# Altium PCB PCB_PCB_dayi_hossein_SSG_2_2025-04-10.pcbdoc
Units mil, origin at the board's own origin, x right, y up, seen from the top; angles counter-clockwise.
Board outline 3346.45 x 1968.5 mil, 2 copper layers (Top Layer, Bottom Layer); 16 components, 28 nets, 56 pads, 0 vias.
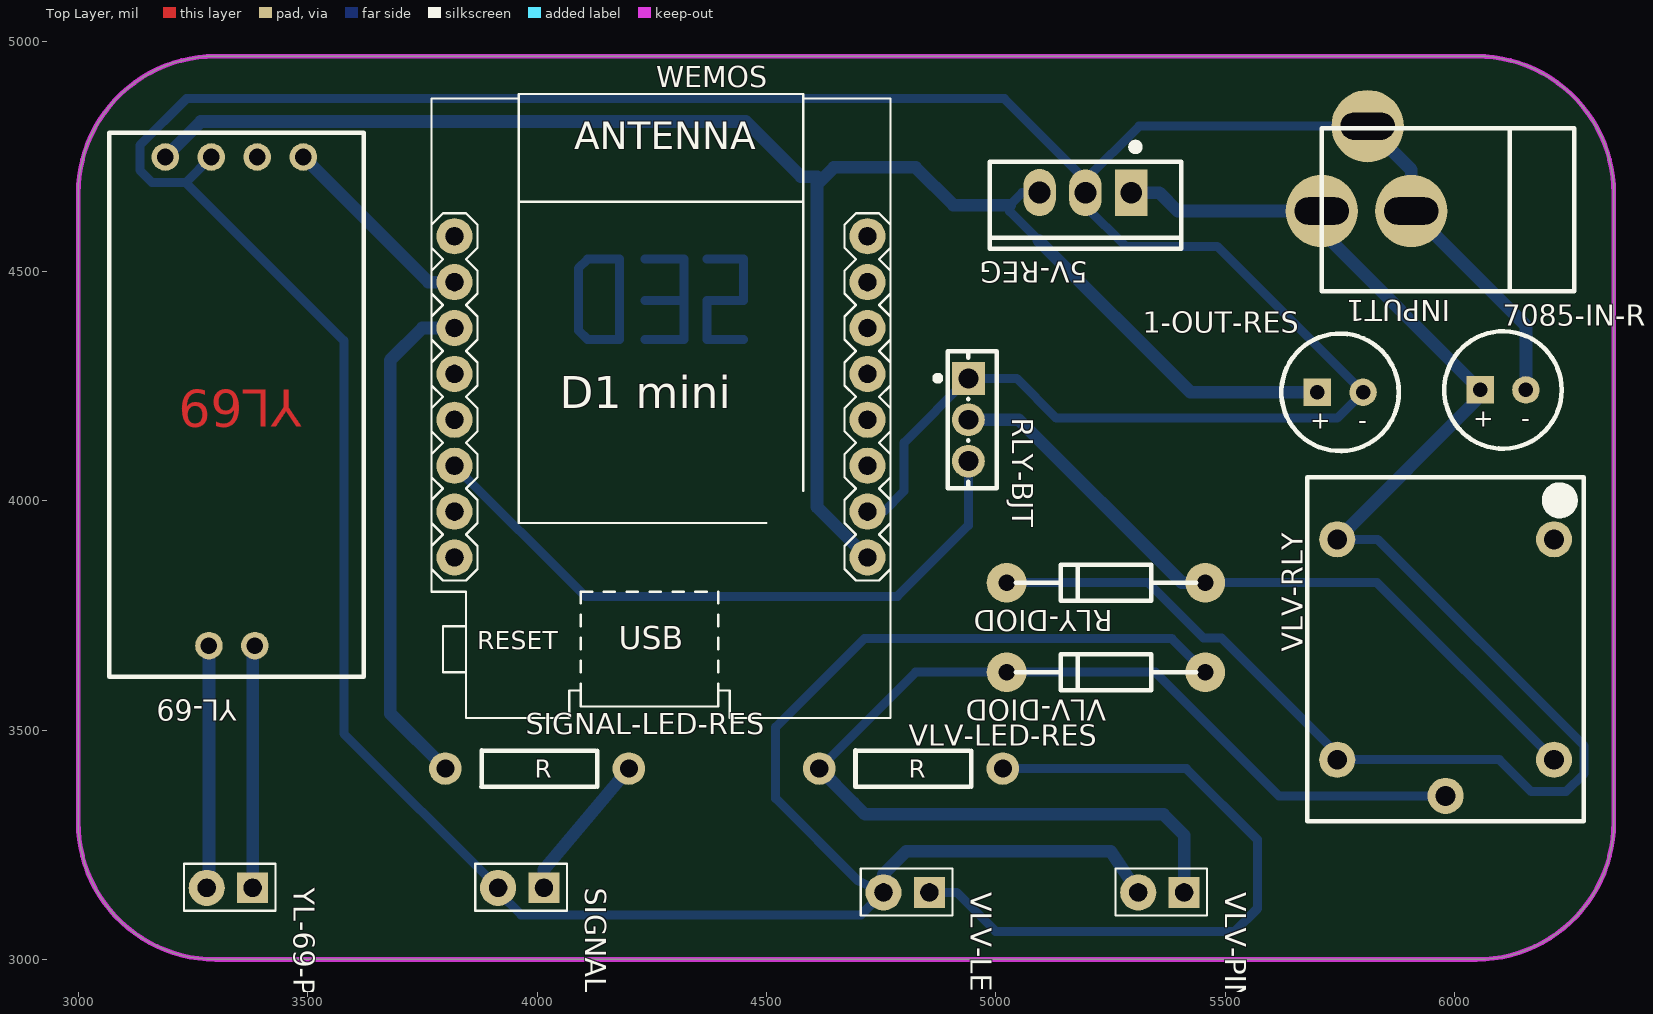
[diagram p0: Top Layer view]
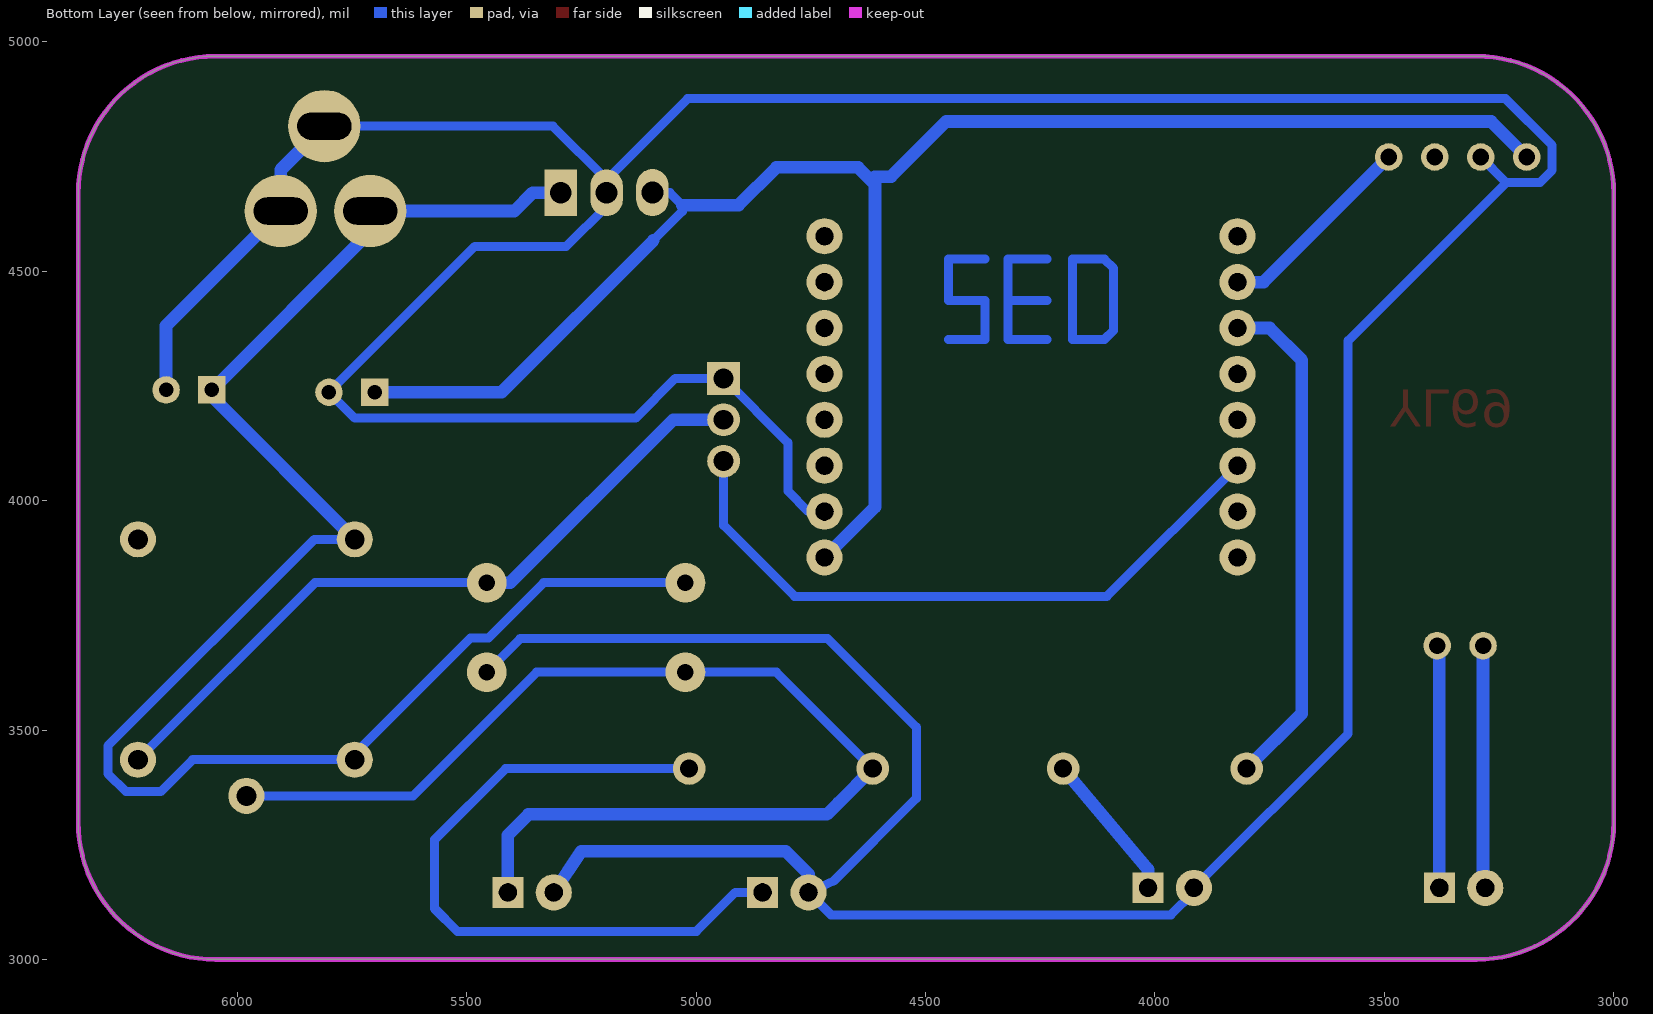
[diagram p1: Bottom Layer view, seen from below]

## Layer stack, top to bottom
Top Solder Mask Layer: solder mask 0.4, Solder Resist, Dk 3.5
Top Layer: signal copper 1.4
Dielectric1: dielectric 12.6, FR-4, Dk 4.8
Bottom Layer: signal copper 1.4
Bottom Solder Mask Layer: solder mask 0.4, Solder Resist, Dk 3.5

## Board outline
6346.45,3299.21 cw(c6047.24,3299.21) 6047.24,3000 3299.21,3000 cw(c3299.21,3299.21) 3000,3299.21 3000,4669.29 cw(c3299.21,4669.29) 3299.21,4968.5 6047.24,4968.5 cw(c6047.24,4669.29) 6346.45,4669.29

## Design rules (kind name [scope] priority, off if disabled: settings)
Clearance Default [All] p1: gap=15.7 ignorepadtopadclearanceinfootprint=FALSE except(0: Region-Region; 7: Arc-Arc Arc-Track Arc-SMDPad Arc-THPad Arc-Via Arc-Fill Arc-Poly Arc-Region Arc-Text Arc-Hole)
PasteMaskExpansion Common_1 [All] p1: expansion=0
PlaneConnect Default_3 [All] p1: planeconnectstyle=Relief reliefexpansion=20 reliefentries=4 reliefconductorwidth=0 reliefairgap=1
PolygonConnect Default_4 [All] p1: connectstyle=Relief reliefconductorwidth=10 reliefentries=4 polygonreliefangle="90 Angle" airgapwidth=10
RoutingVias Default_2 [All] p1: holewidth=15.75 width=27.56 viastyle="Through Hole" minholewidth=15.75 minwidth=27.56 maxholewidth=2362 maxwidth=3938
SolderMaskExpansion Common [All] p1: expansion=2 istentingtop=FALSE useseparateexpansions=TRUE expansionbottom=2 istentingbottom=FALSE
Width Default_1 [All] p1: maxlimit=1000 minlimit=20 preferedwidth=20
28 further rules are at their usual default settings.

## Components (designator, comment, footprint, x,y, rotation, side; value= is the part's Value field where it differs from the comment)
1-OUT-RES "10uF" "CAPACITOR, 100UF 2.54MM PIN CAPACITOR" 5750,4236.14 r0 top
5V-REG "LM7805T" TO-220-3_L10.0-W4.5-P2.54-L 5195,4671.14 r180 top
7085-IN-RES "33uF" "CAPACITOR, 100UF 2.54MM PIN CAPACITOR" 6105,4241.14 r0 top
INPUT1 "12V JACK" "12V JACK" 6260,4456.14 r180 top
RLY-BJT "BD137" TO-126-3_L7.6-W2.7-P2.30-L 4940,4176.14 r270 top
RLY-DIOD "1N4007" DIODE_1N4007 5220,3821.14 r180 top
SIGNAL-LED "2.45MM_1*2_PIN" CONNECTOR_PINHEADER_2.54MM:PINHEADER_1X11_P_2.54MM 4015,3156.14 r270 top
SIGNAL-LED-RES "180-220 ohm" "RESISTOR (UPDATED HOLES)" 4000,3416.14 r0 top
VLV-DIOD "1N4007" DIODE_1N4007 5220,3626.14 r180 top
VLV-LED "2.45MM_1*2_PIN" CONNECTOR_PINHEADER_2.54MM:PINHEADER_1X11_P_2.54MM 4855,3146.14 r270 top
VLV-LED-RES "490-510 ohm" "RESISTOR (UPDATED HOLES)" 4815,3416.14 r0 top
VLV-PINS "2.45MM_1*2_PIN" CONNECTOR_PINHEADER_2.54MM:PINHEADER_1X11_P_2.54MM 5410,3146.14 r270 top
VLV-RLY "Relay - 12V" RELAY-TH_BC_JQC-3FB-S-XXX-1Z11 5980,3636.14 r90 top
WEMOS "WEMOS_D1_MINI_PRO4" DIP-16_WEMOS_D1_MINI_PRO4 4270,4226.14 r0 top
YL-69 "YL-69" footprint_017c 3345,4161.14 r180 top
YL-69-PINS "2.45MM_1*2_PIN" CONNECTOR_PINHEADER_2.54MM:PINHEADER_1X11_P_2.54MM 3380,3156.14 r270 top

## Footprints (in the part's own frame and the unit in brackets; to place one, negate y for a bottom-side part, rotate by r counter-clockwise, add the part's x,y. Pads: shape width x height; smd on the part's side, far side on the other; paste and mask are expansions set on the pad)
"12V JACK" [mm]
  round 4 hole 1.5 slot 3 at 0 deg paste+0 mask+0.102: GND(9.017,-4.445) GND(11.43,-9.144) Vcc(13.97,-4.445)
  silkscreen extent 0,-9.02 13.97,0
"CAPACITOR, 100UF 2.54MM PIN CAPACITOR" [mm]
  rect 1.52x1.52 hole 0.8 paste+0 mask+0.051: 1(-1.27,0)
  round 1.52 hole 0.8 paste+0 mask+0.051: 2(1.27,0)
  silkscreen extent -3.25,-3.25 3.25,3.25
CONNECTOR_PINHEADER_2.54MM:PINHEADER_1X11_P_2.54MM [mm]
  rect 1.7x1.7 hole 1 slot 1.005 at 0 deg: 1(0,0)
  round 2 hole 1 slot 1.005 at 0 deg: 2(0,-2.54)
  silkscreen extent -1.33,-3.8 1.27,1.27
DIODE_1N4007 [mm]
  round 2.2 hole 0.914: 1(-6,0) 2(5,0)
  silkscreen extent -5.5,-1 4.5,1
DIP-16_WEMOS_D1_MINI_PRO4 [mm]
  round 2 hole 1 paste+0 mask+0.05: 1(11.43,8.89) 2(11.43,6.35) 3(11.43,3.81) 4(11.43,1.27) 5(11.43,-1.27) 6(11.43,-3.81) 7(11.43,-6.35) 8(11.43,-8.89) 9(-11.43,8.89) 10(-11.43,6.35) 11(-11.43,3.81) 12(-11.43,1.27) 13(-11.43,-1.27) 14(-11.43,-3.81) 15(-11.43,-6.35) 16(-11.43,-8.89)
  silkscreen extent -12.7,-17.78 12.7,16.76
footprint_017c [mil]
  round 60 hole 36: 1(-145.53,-587.7) 2(-45.02,-587.7) 3(55.02,-587.7) 4(155.11,-587.7) 5(-40.02,477.3) 6(60.02,477.3)
  silkscreen extent -278,-640 278,545
RELAY-TH_BC_JQC-3FB-S-XXX-1Z11 [mm]
  round 2 hole 1.1 paste+0 mask+0.05: 11(-7.1,0) 12(7.1,-6) 14(7.1,6) A1(-5.1,-6) A2(-5.1,6)
  silkscreen extent -8.5,-7.65 10.54,7.65
"RESISTOR (UPDATED HOLES)" [mm]
  round 1.8 hole 1 paste+0 mask+0.102: 1(-5.08,0) 2(5.08,0)
  silkscreen extent -3.08,-1.02 3.33,1.01
TO-126-3_L7.6-W2.7-P2.30-L [mil]
  rect 71.5x71.5 hole 43.31: 1(-90.16,0)
  round 71.5 hole 43.31: 2(0,0) 3(90.16,0)
  silkscreen extent -150,-73 150,62
TO-220-3_L10.0-W4.5-P2.54-L [mm]
  rect 1.8x2.6 hole 1.2: 1(-2.54,0.005)
  oval 1.8x2.6 hole 1.2: 2(0,0.005)
  oval 1.8x2.6 hole 1.2 copper offset 0,0: 3(2.541,-0.005)
  silkscreen extent -5.3,-2.73 5.3,3.09

## Nets (pads, with @x,y where several pads share a name; then routed paths per layer and width w, separated by ;. In a path a pad name is that pad's centre, name@x,y a point inside that pad or via, vN(x,y) a via of type N, cw(c..) or ccw(c..) an arc to the next point about the centre after c; other vN are vias at no path point)
+5V: 1-OUT-RES.1 5V-REG.3 WEMOS.8 YL-69.4 | length 4514.2
  Bottom Layer w19.68: 5V-REG.3 5057.2,4671.34 5029.82,4643.96 5029.82,4630.27 5423.95,4236.14 1-OUT-RES.1
  Bottom Layer w27.56: YL-69.4 3267.2,4826.14 4455,4826.14 4575,4706.14 4610,4706.14 4610,3986.14 WEMOS.8 ; 4610,4689.42 4646.72,4726.14 4825,4726.14 4907.18,4643.96 5029.82,4643.96 ; 5092.96,4567.13 5423.95,4236.14 1-OUT-RES.1
GND: 1-OUT-RES.2 5V-REG.2 7085-IN-RES.2 INPUT1.GND RLY-BJT.1 SIGNAL-LED.2 VLV-DIOD.1 VLV-LED.2 VLV-PINS.2 WEMOS.7 YL-69.3 | length 11615.1
  Bottom Layer w19.68: 3234.3,4693.24 3161.2,4693.24 3134.2,4720.24 3134.2,4774.34 3236,4876.14 5018.2,4876.14 5V-REG.2@5195,4699.34 ; YL-69.3 3234.33,4693.19 3579.08,4348.44 3579.08,3492.06 SIGNAL-LED.2 3915,3147.02 3965,3097.02 4705.88,3097.02 VLV-LED.2 ; WEMOS.7 4755,3976.14 4799.9,4021.04 4799.9,4126.14 RLY-BJT.1 ; VLV-LED.2@4770.82,3171.08 4755,3155.26 VLV-LED.2 ; RLY-BJT.1@4940,4243.06 RLY-BJT.1 5044.84,4266.3 5131.4,4179.74 5743.6,4179.74 1-OUT-RES.2 5482.19,4553.95 5283.04,4553.95 5195,4641.99 5195,4670.95 5195,4699.29 5311.85,4816.14 5810,4816.14 5905,4721.14 5905,4631.14 6155,4381.14 7085-IN-RES.2 ; VLV-DIOD.1 5383.1,3699.24 4713.1,3699.24 4520,3506.14 4520,3351.14 4700.1,3171.04 VLV-LED.2
  Bottom Layer w27.56: VLV-LED.2 4755,3186.14 4805,3236.14 5250,3236.14 VLV-PINS.2 ; INPUT1.GND@5810,4816.14 5905,4721.14 5905,4631.14 6155,4381.14 7085-IN-RES.2
S$171047:  | length 430
  Bottom Layer w19.68: 4235,4351.14 4320,4351.14 4320,4436.14 ; 4235,4436.14 4320,4436.14 ; 4235,4526.14 4320,4526.14 4320,4436.14
S$171098:  | length 506.6
  Bottom Layer w19.68: 4090,4371.14 4090,4506.14 4110,4526.14 4180,4526.14 4180,4351.14 4110,4351.14 4090,4371.14
S$171102:  | length 415
  Bottom Layer w19.68: 4370,4526.14 4450,4526.14 4450,4436.14 4370,4436.14 4370,4351.14 4450,4351.14
SIGNAL-LED-RES_2: SIGNAL-LED-RES.2 SIGNAL-LED.1 | length 327.4
  Bottom Layer w27.56: SIGNAL-LED.1 4015,3196.14 SIGNAL-LED-RES.2
VCC: 5V-REG.1 7085-IN-RES.1 INPUT1.Vcc RLY-DIOD.2 VLV-RLY.14 VLV-RLY.A2 | length 3674.8
  Bottom Layer w19.68: RLY-DIOD.2 5331.91,3821.14 5452.56,3700.49 5491.9,3700.49 5743.78,3448.61 VLV-RLY.A2 6096.84,3435.35 6166.57,3365.62 6242.23,3365.62 6281.6,3404.99 6281.6,3465.58 5831.51,3915.67 VLV-RLY.14
  Bottom Layer w27.56: 5V-REG.1 5356.05,4670.94 5395.85,4631.14 INPUT1.Vcc 5710,4586.14 7085-IN-RES.1 6055,4226.89 VLV-RLY.14
VLV-LED-RES_2: VLV-LED-RES.2 VLV-LED.1 | length 1540.1
  Bottom Layer w19.68: VLV-LED.1 4914.07,3146.14 ; 4914.1,3146.14 4999.1,3061.14 5520,3061.14 5570,3111.14 5570,3261.14 5415,3416.14 VLV-LED-RES.2
VLV-RLY_11: VLV-DIOD.2 VLV-LED-RES.1 VLV-PINS.1 VLV-RLY.11 | length 2543.7
  Bottom Layer w19.68: VLV-LED-RES.1 4825,3626.14 VLV-DIOD.2 5347.22,3626.14 5616.75,3356.61 VLV-RLY.11
  Bottom Layer w27.56: VLV-LED-RES.1 4690,3341.14 4715,3316.14 5365,3316.14 5410,3271.14 VLV-PINS.1
VLV-RLY_12: VLV-RLY.12
VLV-RLY_A1: RLY-BJT.2 RLY-DIOD.1 VLV-RLY.A1 | length 1583
  Bottom Layer w19.68: RLY-DIOD.1 5830.43,3821.14 VLV-RLY.A1
  Bottom Layer w27.56: RLY-BJT.2 5050,4176.14 5405,3821.14 RLY-DIOD.1
WEMOS_1: WEMOS.1
WEMOS_2: WEMOS.2
WEMOS_3: WEMOS.3
WEMOS_4: WEMOS.4
WEMOS_5: WEMOS.5
WEMOS_6: WEMOS.6
WEMOS_9: WEMOS.9
WEMOS_10: WEMOS.10 YL-69.1 | length 442.4
  Bottom Layer w27.56: YL-69.1 3763.23,4476.14 WEMOS.10
WEMOS_11: SIGNAL-LED-RES.1 WEMOS.11 | length 1108.7
  Bottom Layer w27.56: SIGNAL-LED-RES.1 3680,3536.14 3680,4306.14 3750,4376.14 WEMOS.11
WEMOS_12: WEMOS.12
WEMOS_13: WEMOS.13
WEMOS_14: RLY-BJT.3 WEMOS.14 | length 1442.1
  Bottom Layer w19.68: WEMOS.14 4105,3791.14 4785,3791.14 4940,3946.14 RLY-BJT.3@4940,4085.94
WEMOS_15: WEMOS.15
WEMOS_16: WEMOS.16
YL69_2: YL-69.2
YL69_5: YL-69-PINS.1 YL-69.5 | length 529.8
  Bottom Layer w27.56: YL-69-PINS.1 3380,3678.82 YL-69.5
YL69_6: YL-69-PINS.2 YL-69.6 | length 529.8
  Bottom Layer w27.56: YL-69-PINS.2 3284.98,3161.12 YL-69.6

## Keep-outs
Board Outline Layer:
  the board outline again, w10

## Text inside footprints (layer, text, board x,y; h text height)
1-OUT-RES: Top Silkscreen Layer "-" at 5790,4156.14 h39.37; Top Silkscreen Layer "+" at 5685,4156.14 h39.37
7085-IN-RES: Top Silkscreen Layer "-" at 6145,4161.14 h39.37; Top Silkscreen Layer "+" at 6040,4161.14 h39.37
SIGNAL-LED-RES: Top Silkscreen Layer "R" at 3995,3396.14 h39.37
VLV-LED-RES: Top Silkscreen Layer "R" at 4810,3396.14 h39.37
WEMOS: Top Silkscreen Layer "ANTENNA" at 4081,4766.14 h60; Top Silkscreen Layer "D1 mini" at 4049.5,4201.14 h70; Top Silkscreen Layer "RESET" at 3870,3676.14 h40; Top Silkscreen Layer "USB" at 4177.5,3676.14 h50
YL-69: Top Layer "YL69" at 3487.5,4241.34 h80 r180